# Allegro board CC13xxEM-7XD-7793.brd
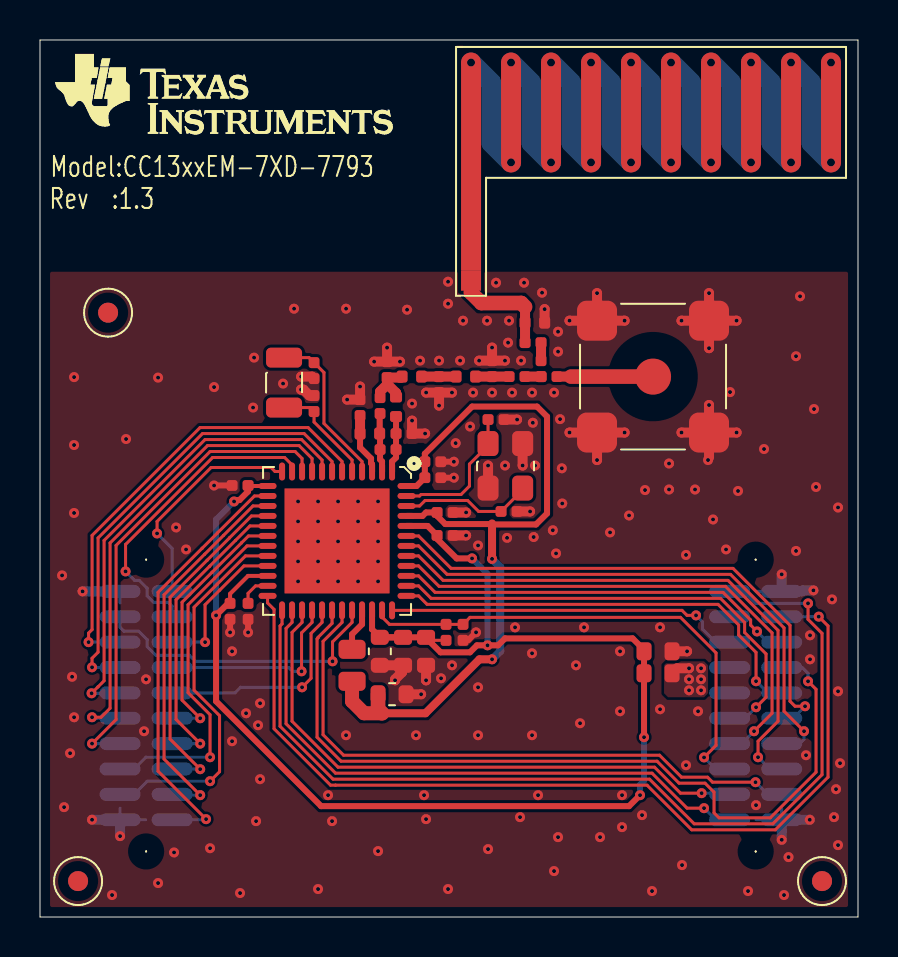
[diagram p0: board, top side]
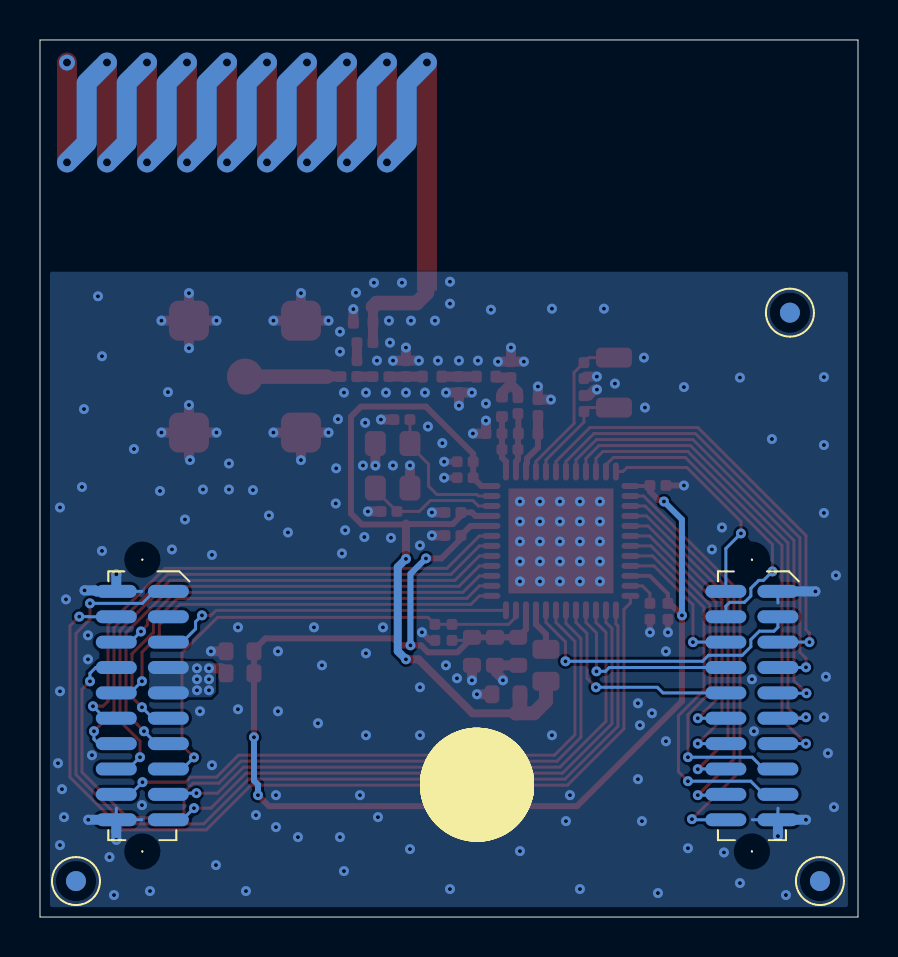
[diagram p1: board, bottom side, seen from below]

Outline 40.9 x 43.9 mm; copper layers: TOP, BOTTOM. Coordinates in mm from the lower left corner of the outline.
Outline path: 0,43.9 0,0 40.9,0 40.9,43.9 0,43.9

## Placement (name value [footprint] x y rotation side)
A1  Antenna PCB helix 868/915MHz  [ANTENNA868_915MHZ]  21.55 31.85 0 top
C1  DNM  [CAPC1608X90L]  30.2 13.3 0 top
C11  3.6pF  [CAPC1005X60L]  17.8 24.2 0 top
C12  2.7pF  [CAPC1005X60L]  17.35 27 90 top
C13  6.2pF  [CAPC1005X60L]  19.95 26.25 90 top
C14  3.3pF  [CAPC1005X60L]  22.6 27.85 270 top
C15  100pF  [CAPC1005X60L]  24.25 27.05 180 top
C16  1pF  [CAPC1005X60L]  24.25 28.75 0 top
C21  100pF  [CAPC1005X60L]  16 25.9 270 top
C22  3.6pF  [CAPC1005X60L]  17 25.2 90 top
C41  12pF  [CAPC1005X60L]  13.7 27.75 270 top
C51  12pF  [CAPC1005X60L]  13.7 25.3 90 top
C131  100nF  [CAPC1005X60L]  10.4 21.6 180 top
C221  100nF  [CAPC1005X60L]  9.5 15.7 270 top
C231  1uF  [CAPC1005X60L]  10.4 15.7 270 top
C331  22uF  [CAPC1608X100A2L]  16.9 11.15 0 top
C341  22uF  [CAPC1608X100A2L]  16.99 14 270 top
C342  100nF  [CAPC1608X90L]  18.15 14 270 top
C343  NC  [CAPC1608X90L]  19.3 14 270 top
C351  100nF  [CAPC1005X60L]  21.15 14.65 270 top
C441  100nF  [CAPC1005X60L]  19.85 19.1 0 top
C451  100nF  [CAPC1005X60L]  19.85 20.25 0 top
C461  DNM  [CAPC1005X60L]  23.05 20.3 0 top
C471  DNM  [CAPC1005X60L]  22.4 24.9 0 top
C481  100nF  [CAPC1005X60L]  19.24 21.99 0 top
C482  DNM  [CAPC1005X60L]  19.24 22.79 0 top
FIDU1  FIDU_1MM  [FID100X115]  1.9 1.8 0 top
FIDU2  FIDU_1MM  [FID100X115]  39.1 1.8 0 top
FIDU3  FIDU_1MM  [FID100X115]  3.4 30.25 0 top
FIDU4  FIDU_1MM  [FID100X115]  1.9 1.8 180 bottom
FIDU5  FIDU_1MM  [FID100X115]  39.1 1.8 180 bottom
FIDU6  FIDU_1MM  [FID100X115]  3.4 30.25 180 bottom
FL1  BLM18HE152SN1  [FIL_BLM18HE152SN1DL]  30.2 12.2 0 top
J1  SMA-10V21-TGG  [HUSTSAN_SMA10V21TGGAN]  30.65 27.05 0 top
L11  18nH  [IND_LQW15AL#2]  17.8 23.4 180 top
L12  7.5nH  [IND_LQW15AN]  17.8 25.05 90 top
L13  6.8nH  [IND_LQW15AL]  18.1 27.05 0 top
L14  6.8nH  [IND_LQW15AL]  20.8 27.05 0 top
L15  12nH  [IND_LQW15AL]  24.25 29.75 0 top
L21  7.5nH  [IND_LQW15AN]  16 24.2 0 top
L331  6.8uH  [INDC2012X150L]  15.6 13.4 270 top
NOREF  -  []  0 40.78 0 top
NOREF#2  -  []  32.36 0 90 top
NOREF#3  -  []  1.75 43.2 0 top
NOREF#4  -  []  22.22 3.59 180 bottom
P1  SFM-110-02-S-D-A-K-TR  [SAMTEC_SFM11002AN]  4 16.3 0 bottom
P2  SFM-110-02-S-D-A-K-TR  [SAMTEC_SFM11002AN]  34.48 16.3 0 bottom
R11  0  [RESC1005X40L]  25.85 27.05 180 top
R12  DNM  [RESC1005X40L]  25.05 27.05 90 top
R351  100k  [RESC1005X40L]  20.3 14.65 270 top
U1  CC13xx 7x7  [QFNFC50P700X700X80-49CN]  17.6 22.3 180 top
Y1  32.768kHz  [XTAL_FC-135N]  12.2 28 270 top
Y2  24MHz  [OSCCC250X320X60-4L]  22.4 23.7 270 top

## Library data of the parts
A1 = ANTENNA
C1 C342 C343 = CAPACITOR: alternate symbols: (CAPC1608X90L,CAPC1608X90M)
C11-C16 C21 C22 C41 C51 C131 C221 C231 C351 C441 C451 C461 C471 C481 C482 = CAPACITOR: alternate symbols: (CAPC1005X60L,CAPC1005X60M)
C331 C341 = CAPACITOR: User Part Number: #PN; alternate symbols: (CAPC1608X100A2L,CAPC1608X100A2M)
FIDU1-FIDU6 = FIDMARK
FL1 = FILTER_2PIN: alternate symbols: (FIL_BLM18HE152SN1DL,FIL_BLM18HE152SN1DM)
J1 = CONN_COAX_1+4: alternate symbols: (HUSTSAN_SMA10V21TGGL,HUSTSAN_SMA10V21TGGM)
L11 = INDUCTOR: alternate symbols: (IND_LQW15AL,IND_LQW15AM,INDC1005X60L,INDC1005X60M)
L12-L15 L21 = INDUCTOR: alternate symbols: (IND_LQW15AM,IND_LQW15AL)
L331 = INDUCTOR: alternate symbols: (INDC2012X150L,INDC2012X150M)
P1 P2 = CONN_HEADER_2X10_P_S
R11 R12 R351 = RESISTOR: alternate symbols: (RESC1005X40L,RESC1005X40M)
U1 = IC_RF_CC13XX_7X7_QFN48_V2: alternate symbols: (QFNFC50P700X700X80-49CL,QFNFC50P700X700X80-49CM)
Y1 = CRYSTAL: alternate symbols: (XTAL_FC-135L,XTAL_FC-135M)
Y2 = XTAL_4PIN_S: alternate symbols: (OSCCC250X320X60-4L,OSCCC250X320X60-4M)

## Footprints (pads in the part's own frame, mm; a bottom-side part is the same pattern mirrored in y, then rotated)
ANTENNA868_915MHZ
  rect 1x1 smd: 1(0,0)
CAPC1005X60L
  custom 0.55x0.54 smd: 1(0,0) 2(0.8,0)
CAPC1608X90L
  custom 0.75x0.9 smd: 1(0,0) 2(1.4,0)
CAPC1608X100A2L
  custom 0.75x0.9 smd: 1(0,0) 2(1.4,0)
FID100X115
  oval 1x1 smd: 1(0,0)
FIL_BLM18HE152SN1DL
  custom 0.75x0.9 smd: 1(0,0) 2(1.4,0)
HUSTSAN_SMA10V21TGGAN
  round 1.801 smd: 1(0,0)
  custom 2x2 smd: 2(-2.8,-2.8) 3(2.8,-2.8) 4(2.8,2.8) 5(-2.8,2.8)
IND_LQW15AL
  custom 0.55x0.6 smd: 1(0,0) 2(0.98,0)
IND_LQW15AL#2
  custom 0.55x0.54 smd: 1(0,0) 2(0.8,0)
IND_LQW15AN
  custom 0.55x0.6 smd: 1(0,0) 2(0.98,0)
INDC2012X150L
  custom 0.95x1.352 smd: 1(0,0) 2(1.6,0)
OSCCC250X320X60-4L
  custom 1.25x1.05 smd: 1(0,0) 2(2.23,0) 3(2.23,1.73) 4(0,1.73)
QFNFC50P700X700X80-49CN
  oval 0.3x0.9 smd: 1(0,0) 2(0.5,0) 3(1,0) 4(1.5,0) 5(2,0) 6(2.5,0) 7(3,0) 8(3.5,0) 9(4,0) 10(4.5,0) 11(5,0) 12(5.5,0) 25(5.5,6.95) 26(5,6.95) 27(4.5,6.95) 28(4,6.95) 29(3.5,6.95) 30(3,6.95) 31(2.5,6.95) 32(2,6.95) 33(1.5,6.95) 34(1,6.95) 35(0.5,6.95) 36(0,6.95)
  oval 0.9x0.3 smd: 13(6.225,0.725) 14(6.225,1.225) 15(6.225,1.725) 16(6.225,2.225) 17(6.225,2.725) 18(6.225,3.225) 19(6.225,3.725) 20(6.225,4.225) 21(6.225,4.725) 22(6.225,5.225) 23(6.225,5.725) 24(6.225,6.225) 37(-0.725,6.225) 38(-0.725,5.725) 39(-0.725,5.225) 40(-0.725,4.725) 41(-0.725,4.225) 42(-0.725,3.725) 43(-0.725,3.225) 44(-0.725,2.725) 45(-0.725,2.225) 46(-0.725,1.725) 47(-0.725,1.225) 48(-0.725,0.725)
  rect 5.25x5.25 smd: 49(2.75,3.475)
RESC1005X40L
  custom 0.55x0.54 smd: 1(0,0) 2(0.8,0)
SAMTEC_SFM11002AN
  round 0.099 hole 1.501 unplated: (1.302,-1.588) (1.302,13.017)
  oval 2.05x0.65 smd: 1(0,0) 2(2.604,0) 3(0,1.27) 4(2.604,1.27) 5(0,2.54) 6(2.604,2.54) 7(0,3.81) 8(2.604,3.81) 9(0,5.08) 10(2.604,5.08) 11(0,6.35) 12(2.604,6.35) 13(0,7.62) 14(2.604,7.62) 15(0,8.89) 16(2.604,8.89) 17(0,10.16) 18(2.604,10.16) 19(0,11.43) 20(2.604,11.43)
XTAL_FC-135N
  custom 1x1.8 smd: 1(0,0) 2(2.5,0)

## Nets
GND: C1.2 C11.2 C12.2 C13.1 C14.1 C21.1 C41.2 C51.2 C131.2 C221.2 C231.2 C331.2 C341.2 C342.2 C343.2 C351.2 C441.2 C451.2 C461.2 C471.2 C481.2 C482.2 J1.2 J1.3 J1.4 J1.5 L15.2 P1.1 P1.19 P2.2 P2.20 U1.49(VSS) Y2.2 Y2.4
VDD_EB: FL1.2 P2.7 P2.9
VDDR: C331.1 C451.1 C481.1 C482.1 L331.2 U1.45(VDDR#45) U1.48(VDDR#48)
VDDS: C1.1 C131.1 C221.1 C341.1 C342.1 C343.1 C441.1 FL1.1 R351.2 U1.13(VDDS2) U1.22(VDDS3) U1.34(VDDS_DCDC) U1.44(VDDS)
DCDC_SW: L331.1 U1.33(DCDC_SW)
DIO_1: P1.5 U1.6(DIO_1)
DIO_2: P1.7 U1.7(DIO_2)
DIO_3: P1.9 U1.8(DIO_3)
DIO_4: P1.11 U1.9(DIO_4)
DIO_5: P1.13 U1.10(DIO_5)
DIO_6: P1.4 U1.11(DIO_6)
DIO_7: P1.2 U1.12(DIO_7)
DIO_8: P1.20 U1.14(DIO_8)
DIO_9: P1.18 U1.15(DIO_9)
DIO_10: P1.16 U1.16(DIO_10)
DIO_11: P1.14 U1.17(DIO_11)
DIO_12: P1.12 U1.18(DIO_12)
DIO_13: P1.15 U1.19(DIO_13)
DIO_14: P1.17 U1.20(DIO_14)
DIO_15: P1.6 U1.21(DIO_15)
DIO_16 / JTAG TDO: P2.19 U1.26(DIO_16)
DIO_17 / JTAG TDI: P2.17 U1.27(DIO_17)
DIO_18: P1.8 U1.28(DIO_18)
DIO_19: P1.10 U1.29(DIO_19)
DIO_20: P2.8 U1.30(DIO_20)
DIO_21: P2.18 U1.31(DIO_21)
DIO_22: P1.3 U1.32(DIO_22)
DIO_23: P2.5 U1.36(DIO_23)
DIO_24: P2.10 U1.37(DIO_24)
DIO_25: P2.11 U1.38(DIO_25)
DIO_26: P2.6 U1.39(DIO_26)
DIO_27: P2.13 U1.40(DIO_27)
DIO_28: P2.16 U1.41(DIO_28)
DIO_29: P2.14 U1.42(DIO_29)
DIO_30: P2.12 U1.43(DIO_30)
JTAG_TCK: P2.1 U1.25(JTAG_TCKC)
JTAG_TMS: P2.4 U1.24(JTAG_TMSC)
NRESET: C351.1 P2.15 R351.1 U1.35(RESET_N)
N352644: J1.1 R11.1
N353082: A1.1(FEED/GND_1) C16.1 L15.1
N429469: C461.1 U1.46(X24M_N) Y2.3
N430333: C22.1 L11.2 L21.2 U1.2(RF_N)
N430341: C11.1 L11.1 L12.1 U1.1(RF_P)
N430415: C12.1 C22.2 L12.2 L13.1
N430451: C13.2 L13.2 L14.1
N430545: C231.1 U1.23(DCOUPL)
N430561: C41.1 U1.4(X32K_Q1) Y1.1
N430573: C51.1 U1.5(X32K_Q2) Y1.2
N431011: C14.2 C15.2 L14.2
N436267: C15.1 R11.2 R12.1
N437185: C16.2 R12.2
N440626: C21.2 L21.1 U1.3(RX_TX)
N460170: C471.1 U1.47(X24M_P) Y2.1

Pads without a net: FIDU1 1; FIDU2 1; FIDU3 1; FIDU4 1; FIDU5 1; FIDU6 1; P2 3

## Via types
v1: diameter 0.8, hole 0.4, TOP to BOTTOM, 19 vias
v2: diameter 0.5, hole 0.2, TOP to BOTTOM, 259 vias

## Routing (per net, layer and track width the routed paths; a pad name or vN(x,y) marks a point on that pad's centre or on a via; arc(x,y) is an arc through that point)
GND: length 58
  TOP w0.15: v2(14.9,18.8) 14.88,18.83 U1.49
  TOP w0.3: v2(10.4,14.25) C231.2 ; v2(20.7,21.99) C481.2 ; v2(21.8,14.25) 21.43,13.88 21.38,13.88 21.35,13.85 C351.2 ; v2(20.7,22.79) C482.2 ; C131.2 v2(8.7,21.6) ; C221.2 v2(9.5,14.25)
  TOP w0.5: v2(27.85,22.87) J1.2 ; J1.2 v2(26.48,24.25) ; J1.2 v2(29.23,24.25) ; v2(13.06,27.05) 13.6,27.05 C41.2 ; J1.4 v2(33.45,31.23) ; J1.4 v2(32.08,29.85) ; J1.4 v2(34.83,29.85) ; J1.4 v2(33.45,28.47) ; C471.2 v2(23.86,24.9) ; v2(15.36,25.9) C21.1 v2(16,26.55) ; Y2.2 v2(22.4,22.6) ; J1.3 v2(32.08,24.25) ; J1.3 33.45,23 ; J1.3 v2(34.83,24.25) ; J1.3 v2(33.45,25.63) ; C12.2 v2(16.71,27.8) ; C12.2 v2(18,27.8) ; C12.2 v2(17.35,28.5) ; C441.2 v2(21.31,19.1) ; v2(17.75,11.85) 17.75,11.9 18.1,12.25 18.1,12.4 18.15,12.45 C342.2 17.1,12.6 ; J1.5 v2(27.85,31.23) ; J1.5 v2(29.23,29.85) ; J1.5 v2(26.48,29.85) ; C451.2 v2(21.31,20.25) ; C13.1 v2(19.95,25.6) ; C13.1 v2(19.31,26.25) ; C13.1 v2(20.6,26.25) ; v2(19.3,11.85) C343.2 ; C14.1 v2(23.25,27.85) ; C14.1 v2(21.96,27.85) ; C14.1 v2(22.6,28.5) ; C331.2 v2(19.06,11.15) ; C51.2 13.48,26.1 13.18,26.4 v2(13.05,26.4) ; Y2.4 v2(24.13,22.6) ; v2(18.6,24.85) C11.2 v2(19.26,24.2) ; L15.2 v2(25.23,30.43) ; C1.2 v2(32.36,13.3) ; C461.2 v2(24.51,20.3)
  BOTTOM w0.15: 4,15.72 P1.1 ; 37.09,5.45 P2.20 35.81,4.87 ; 5.28,4.87 P1.19 4,5.45 ; 38.08,16.3 38.36,16.3 ; 35.81,16.3 P2.2
  BOTTOM w0.5: v2(38.49,4.87) P2.20 v2(37.09,3.87) ; v2(4,4.05) P1.19 v2(2.6,4.87) ; v2(37.09,17.15) P2.2 38.08,16.3 38.13,16.35 v2(38.67,16.35) ; P1.1 v2(2.13,16.3)
  vias: v2(1.1,17.1) v2(1.2,5.5) v2(1.5,8.2) v2(1.6,12.02) v2(1.7,27.02) v2(1.7,23.62) v2(1.7,20.22) v2(1.7,10) v2(3.6,1.1) v2(4.3,23.92) v2(5.2,9.3) v2(5.3,11.9) v2(5.9,27) v2(5.9,1.7) v2(6.7,3.23) v2(6.8,19.5) v2(7.3,18.4) v2(8.5,3.44) v2(8.7,26.52) v2(9.6,13.3) v2(9.6,8.8) v2(10,1.2) v2(10.3,10.2) v2(10.7,28) v2(10.65,25.5) v2(10.8,4.8) v2(10.9,9.6) v2(11,10.7) v2(11,6.9) v2(12.15,26.7) v2(12.7,30.45) v2(12.9,20.8) v2(12.9,19.8) v2(12.9,18.8) v2(12.9,17.8) v2(12.9,16.8) v2(13.9,20.8) v2(13.9,19.8) v2(13.9,18.8) v2(13.9,17.8) v2(13.9,16.8) v2(13.9,1.4) v2(14.4,6.1) v2(14.6,4.8) v2(14.9,20.8) v2(14.9,19.8) v2(14.9,17.8) v2(14.9,16.8) v2(15.3,30.45) v2(15.3,9.1) v2(15.9,20.8) v2(15.9,19.8) v2(15.9,18.8) v2(15.9,17.8) v2(15.9,16.8) v2(16.9,20.8) v2(16.9,19.8) v2(16.9,18.8) v2(16.9,17.8) v2(16.9,16.8) v2(16.9,3.3) v2(18.35,30.4) v2(18.6,25.7) v2(18.8,9.1) v2(19,27.85) v2(19.2,6.1) v2(19.3,4.9) v2(19.95,27.85) v2(20.05,11.95) v2(20.4,31.8) v2(20.4,30.7) v2(20.4,1.4) v2(20.6,12.6) v2(20.78,23.72) v2(21,27.85) v2(21.15,29.85) v2(21.5,24.55) v2(21.65,26.25) v2(21.9,18.6) v2(21.9,11.5) v2(21.9,9.1) v2(22.35,29.85) v2(22.4,3.4) v2(22.6,26.25) v2(22.8,31.75) v2(23.25,22.6) v2(23.35,18.98) v2(23.45,29.85) v2(23.4,28.75) v2(23.6,26.25) v2(23.75,14.5) v2(24,5) v2(24.05,27.85) v2(24.2,31.75) v2(24.6,26.25) v2(24.64,24.74) v2(24.6,13.2) v2(24.6,9.1) v2(24.68,19.02) v2(24.75,22.6) v2(24.9,6.1) v2(25.1,31.25) v2(25.64,19.36) v2(25.7,26.25) v2(25.7,2.3) v2(25.8,18.2) v2(25.9,29.3) v2(25.9,28.3) v2(25.9,4) v2(26,24.92) v2(26.09,22.46) v2(26.11,20.7) v2(26.8,12.6) v2(27,9.7) v2(27.2,14.5) v2(28,4) v2(28.5,19.25) v2(29,13.3) v2(29,10.3) v2(29.1,6.1) v2(29.1,4.5) v2(29.45,20.1) v2(30.1,5.1) v2(30.25,21.37) v2(30.6,1.3) v2(31,14.5) v2(31,10.4) v2(31.45,22.7) v2(31.45,21.4) v2(32.1,2.6) v2(32.3,18.12) v2(32.3,7.6) v2(32.75,21.4) v2(32.9,10.3) v2(33.4,22.87) v2(33.65,19.9) v2(34.3,18.4) v2(34.5,26.27) v2(34.9,21.33) v2(35.4,1.3) v2(35.8,5.6) v2(36.2,23.42) v2(37.2,1.1) v2(37.43,3) v2(37.8,28.07) v2(37.8,18.33) v2(38,31.07) v2(38.3,8.1) v2(38.5,14.1) v2(38.5,12.9) v2(38.7,25.42) v2(38.8,21.52) v2(39.6,15.9) v2(39.7,5) v2(39.8,6.4) v2(39.9,20.5) v2(39.9,11.3) v2(39.9,3.6) v2(40,7.7)
VDD_EB: length 1
  TOP w0.5: v2(32.45,12.45) 31.85,12.45 FL1.2
  vias: v2(32.45,11.9) v2(32.45,11.35) v2(33.05,12.45) v2(33.05,11.9) v2(33.05,11.35)
VDDR: length 39.7
  TOP w0.3: U1.48 18.83,21.58 C481.1 C482.1 19.24,23.19 21.61,25.55 24.85,25.55 25.35,25.05 25.35,20.2 24.8,19.65 22.65,19.65 22.6,19.7 22.57,19.67 20.26,19.67 19.85,20.08 C451.1 19.3,20.25 19.13,20.08 U1.45
  TOP w0.4: 17.1,10.2 19.28,10.2 21.98,12.9 v2(22.6,12.9) ; 22.6,19.7 v2(22.6,17.93)
  TOP w0.7: L331.2 15.6,10.8 16.2,10.2 17.1,10.2
  TOP w0.73: 17.1,10.2 16.9,10.4 C331.1
  BOTTOM w0.4: v2(22.6,17.93) 23.01,17.52 23.01,13.31 v2(22.6,12.9)
VDDS: length 73.7
  TOP w0.15: C343.1 19.45,13.85 R351.2
  TOP w0.2: U1.13 10.43,21.58 C131.1 ; U1.22 10.4,17.08 9.5,16.18 C221.1
  TOP w0.3: C342.1 18.15,14 C341.1 ; C342.1 17,14 16.6,14.4 U1.34 ; C342.1 C343.1 19.3,13.97 20.03,13.25 21.5,13.25 21.85,13.6 v2(22.38,13.6) 22.91,13.6 23.25,13.95 29.63,13.95 30.2,13.38 C1.1 FL1.1 v2(30.2,9) ; C131.1 10.4,21.3 9.98,20.87 9.78,20.87 v2(9.7,20.8) ; v2(21.6,17.95) 20.83,17.95 19.85,18.93 C441.1 19.38,19.58 U1.44 ; C221.1 9.41,15.7 v2(8.8,15.1) 8.8,10.8 14.05,5.55 29.45,5.55 v2(30,6.1)
  BOTTOM w0.3: v2(8.8,15.1) 8.8,19.9 v2(9.7,20.8) ; v2(30,6.1) 30,6.63 30.2,6.83 v2(30.2,9) ; v2(21.6,17.95) 22.38,17.18 v2(22.38,13.6)
DCDC_SW: length 2.2
  TOP w0.3: U1.33 16.1,14.65 15.6,14.15 L331.1
DIO_1: length 22.9
  TOP w0.15: U1.6 15.1,22.8 13.41,24.5 8,24.5 2.6,19.1 2.6,14.39 2.43,14.21 v2(2.43,13.76)
  BOTTOM w0.15: v2(2.43,13.76) P1.5
DIO_2: length 23
  TOP w0.15: v2(2.6,12.5) 2.6,12.95 2.9,13.25 2.9,18.97 8.13,24.2 13.2,24.2 14.6,22.8 U1.7
  BOTTOM w0.15: P1.7 2.81,12.49 2.8,12.5 v2(2.6,12.5)
DIO_3: length 23.3
  TOP w0.15: U1.8 14.1,22.88 13.08,23.9 8.25,23.9 3.2,18.85 3.2,11.82 2.9,11.52 v2(2.58,11.2)
  BOTTOM w0.15: P1.9 3.98,11.2 v2(2.58,11.2)
DIO_4: length 23.8
  TOP w0.15: U1.9 13.6,22.95 12.95,23.6 8.38,23.6 3.5,18.72 3.5,10.45 3.05,10 v2(2.6,10)
  BOTTOM w0.15: v2(2.6,10) 2.8,10 2.85,9.95 P1.11
DIO_5: length 23.9
  TOP w0.15: U1.10 13.1,22.95 12.76,23.3 8.5,23.3 3.8,18.6 3.8,9.88 v2(2.6,8.68)
  BOTTOM w0.15: P1.13 v2(2.6,8.68)
DIO_6: length 15.8
  TOP w0.15: U1.11 12.6,22.63 12.23,23 8.63,23 4.28,18.65 v2(4.28,17.3)
  BOTTOM w0.15: P1.4 6.61,15.56 6.42,15.75 5.68,15.75 5.36,16.07 5.36,16.46 4.96,16.85 4.73,16.85 v2(4.28,17.3)
DIO_7: length 11.3
  TOP w0.15: v2(5.85,19.2) 5.85,19.8 8.55,22.5 11.55,22.5 11.75,22.3 U1.12
  BOTTOM w0.15: P1.2 6.61,18.45 v2(5.85,19.2)
DIO_8: length 21.5
  TOP w0.15: v2(8.3,4.9) 5.9,7.3 5.9,16.26 8.11,18.46 10.72,21.08 U1.14
  BOTTOM w0.15: P1.20 8.27,4.87 v2(8.3,4.9)
DIO_9: length 19.2
  TOP w0.15: U1.15 10.65,20.58 9.18,19.1 9.18,19.1 8.23,18.16 6.2,16.13 6.2,7.91 v2(8.01,6.1)
  BOTTOM w0.15: v2(8.01,6.1) 6.65,6.1 P1.18
DIO_10: length 17.2
  TOP w0.15: U1.16 10.57,20.08 9.48,18.98 9.48,18.98 8.36,17.86 8.36,17.86 6.5,16.01 6.5,8.91 v2(8.01,7.4)
  BOTTOM w0.15: P1.16 7.84,7.41 7.84,7.4 v2(8.01,7.4)
DIO_11: length 15.2
  TOP w0.15: v2(8.01,8.68) 6.8,9.89 6.8,15.88 8.48,17.56 8.48,17.56 9.78,18.85 10.5,19.58 U1.17
  BOTTOM w0.15: v2(8.01,8.68) P1.14
DIO_12: length 13.2
  TOP w0.15: v2(8.01,9.95) 7.1,10.86 7.1,15.76 8.61,17.26 10.42,19.08 U1.18
  BOTTOM w0.15: v2(8.01,9.95) P1.12
DIO_13: length 18
  TOP w0.15: U1.19 10.35,18.58 8.73,16.96 7.4,15.63 7.4,11.23 8.5,10.13 v2(8.5,8)
  BOTTOM w0.15: P1.15 4.7,7.41 5.29,8 v2(8.5,8)
DIO_14: length 18.9
  TOP w0.15: U1.20 10.27,18.08 8.86,16.66 8.86,16.66 7.7,15.51 7.7,11.35 8.98,10.08 8.98,7.27 v2(8.5,6.8)
  BOTTOM w0.15: v2(8.5,6.8) 5.36,6.8 4.7,6.14 P1.17
DIO_15: length 7.4
  TOP w0.15: U1.21 10.2,17.58 8.98,16.36 8.98,16.36 8.25,15.63 v2(8.25,13.76)
  BOTTOM w0.15: P1.6 v2(8.25,13.76)
DIO_16 / JTAG TDO: length 30
  TOP w0.15: U1.26 12.6,14.75 12.3,14.45 12.3,9.67 14.78,7.2 30.6,7.2 32.35,5.45 v2(33.2,5.45)
  BOTTOM w0.15: v2(33.2,5.45) 33.78,4.87 P2.19
DIO_17 / JTAG TDI: length 29.2
  TOP w0.15: v2(33.08,6.2) 32.03,6.2 30.73,7.5 14.9,7.5 12.6,9.8 12.6,14.25 13.1,14.75 U1.27
  BOTTOM w0.15: v2(33.08,6.2) 33.72,6.2 33.78,6.14 P2.17
DIO_18: length 9.8
  TOP w0.15: v2(13.08,12.3) 13.08,14.22 13.6,14.75 U1.28
  BOTTOM w0.15: P1.8 12.44,12.49 12.63,12.3 v2(13.08,12.3)
DIO_19: length 10.9
  TOP w0.15: U1.29 14.1,14.75 13.55,14.2 13.55,11.95 v2(13.1,11.5)
  BOTTOM w0.15: P1.10 9.75,11.22 10.03,11.5 v2(13.1,11.5)
DIO_20: length 41.4
  TOP w0.15: U1.30 14.6,14.7 13.9,14 13.9,13.97 13.85,13.92 13.85,9 15.05,7.8 30.85,7.8 31.95,6.7 33.25,6.7 33.7,6.25 33.7,5.22 33.95,4.97 36.52,4.97 38.8,7.25 38.8,11.4 v2(38.4,11.8)
  BOTTOM w0.15: P2.8 38.11,12.49 38.4,12.2 v2(38.4,11.8)
DIO_21: length 30.8
  TOP w0.15: U1.31 15.1,14.75 14.15,13.8 14.15,9.12 15.18,8.1 30.98,8.1 32.08,7 33.38,7 33.63,6.75 v2(35.78,6.75)
  BOTTOM w0.15: v2(35.78,6.75) 36.39,6.14 P2.18
DIO_22: length 15
  TOP w0.15: v2(14.63,12.8) 14.63,13.77 15.6,14.75 U1.32
  BOTTOM w0.15: P1.3 4,14.5 4.2,14.31 4.93,14.31 5.36,13.88 5.36,13.53 5.79,13.1 7.48,13.1 7.78,12.8 v2(14.63,12.8)
DIO_23: length 17.7
  TOP w0.15: v2(32.8,15.1) 32.35,15.1 32.1,15.35 U1.36
  BOTTOM w0.15: v2(32.8,15.1) 33.12,14.78 33.12,14.42 33.78,13.76 P2.5
DIO_24: length 21.9
  TOP w0.15: v2(35.8,11.8) 35.8,13.25 34.93,14.12 34.93,14.62 33.9,15.65 19.36,15.65 18.93,16.08 U1.37
  BOTTOM w0.15: P2.10 36.39,11.22 v2(35.8,11.8)
DIO_25: length 24.1
  TOP w0.15: v2(35.8,10.5) 36.3,11 36.3,13.17 35.23,14.24 35.23,14.74 34.03,15.95 19.56,15.95 18.93,16.58 U1.38
  BOTTOM w0.15: P2.11 35.25,9.95 v2(35.8,10.5)
DIO_26: length 20.3
  TOP w0.15: v2(35.85,14.29) 35.53,14.61 35.53,14.87 34.15,16.25 19.76,16.25 18.93,17.08 U1.39
  BOTTOM w0.15: P2.6 36.39,13.76 v2(35.85,14.29)
DIO_27: length 26.4
  TOP w0.15: v2(35.7,9.3) 36.6,10.2 36.6,14.22 34.28,16.55 19.96,16.55 18.93,17.58 U1.40
  BOTTOM w0.15: P2.13 35.08,8.68 v2(35.7,9.3)
DIO_28: length 28.3
  TOP w0.15: U1.41 18.93,18.08 20.16,16.85 34.4,16.85 36.9,14.35 36.9,9.8 35.9,8.8 v2(35.9,8)
  BOTTOM w0.15: P2.16 37.08,7.4 36.5,7.4 v2(35.9,8)
DIO_29: length 27.8
  TOP w0.15: U1.42 18.93,18.58 20.36,17.15 34.53,17.15 37.2,14.47 37.2,10.3 v2(38.2,9.3)
  BOTTOM w0.15: v2(38.2,9.3) 38.2,8.9 37.98,8.68 P2.14
DIO_30: length 27.1
  TOP w0.15: U1.43 18.93,19.08 20.56,17.45 34.65,17.45 37.5,14.6 37.5,10.8 37.75,10.55 v2(38.25,10.55)
  BOTTOM w0.15: v2(38.25,10.55) 37.65,9.95 P2.12
JTAG_TCK: length 49
  TOP w0.15: U1.25 12.1,14.67 12,14.57 12,9.55 14.65,6.9 30.48,6.9 32.71,4.67 36.64,4.67 39.1,7.12 39.1,14.2 38.4,14.9 v2(38.4,15.7)
  BOTTOM w0.15: P2.1 35.18,16.3 35.78,15.7 v2(38.4,15.7)
JTAG_TMS: length 47.8
  TOP w0.15: v2(38.94,15.04) 39.4,14.57 39.4,7 36.77,4.37 32.59,4.37 30.35,6.6 14.78,6.6 14.78,6.6 14.53,6.6 11.7,9.42 11.7,15.4 11.38,15.72 U1.24
  BOTTOM w0.15: P2.4 38.48,15.03 38.49,15.04 v2(38.94,15.04)
Net_1:
  vias: v1(23.55,42.77) v1(25.55,37.77)
Net_2:
  vias: v1(25.55,42.77) v1(27.55,37.77)
Net_3:
  vias: v1(27.55,42.77) v1(29.55,37.77)
Net_4:
  vias: v1(29.55,42.77) v1(31.55,37.77)
Net_5:
  vias: v1(31.55,42.77) v1(33.55,37.77)
Net_6:
  vias: v1(33.55,42.77) v1(35.55,37.77)
Net_7:
  vias: v1(35.55,42.77) v1(37.55,37.77)
Net_8:
  vias: v1(37.55,42.77) v1(39.55,42.77) v1(39.55,37.77)
Net_9:
  vias: v1(21.55,42.77) v1(23.55,37.77)
NRESET: length 25.1
  TOP w0.15: U1.35 17.1,15.02 17.47,14.65 R351.1 C351.1 21.5,15 32.03,15 33.8,13.22 33.8,8.59 v2(33.2,7.99)
  BOTTOM w0.15: P2.15 33.78,7.41 v2(33.2,7.99)
N352644: length 4.8
  TOP w0.5: 26.55,27.05 R11.1
  TOP w0.73: J1.1 26.55,27.05
N353082: length 5.4
  TOP w0.5: 24.25,30.54 L15.1 C16.1
  TOP w0.73: 24.25,30.54 24.06,30.73 22.07,30.73 21.55,31.25 A1.1
N429469: length 6.7
  TOP w0.15: U1.46 18.98,20.58 19.26,20.85 21.38,20.85 21.93,20.3 C461.1 24.13,21.38 Y2.3
N430333: length 3
  TOP w0.3: C22.1 16.98,25.18 L21.2 17,24.18 L11.2 17,22.9 17.1,22.8 U1.2
N430341: length 2.8
  TOP w0.3: L12.1 C11.1 L11.1 17.8,23 17.6,22.8 U1.1
N430415: length 2.8
  TOP w0.5: 17.35,26.69 17.35,26.65 17,26.3 C22.2 ; 17.35,26.69 C12.1 18.05,27 L13.1 ; 17.35,26.69 17.8,26.24 L12.2
N430451: length 1.7
  TOP w0.5: L13.2 C13.2 L14.1
N430545: length 1.6
  TOP w0.15: U1.23 10.78,16.58 10.4,16.2 C231.1
N430561: length 8
  TOP w0.15: U1.4 16.1,22.8 14.2,24.7 14.2,27.25 C41.1 13.45,28 Y1.1
N430573: length 5.4
  TOP w0.15: U1.5 15.6,22.88 13.7,24.77 C51.1 13.5,25.5 Y1.2
N431011: length 1.7
  TOP w0.5: C15.2 C14.2 L14.2
N436267: length 0.8
  TOP w0.5: C15.1 R12.1
N437185: length 0.9
  TOP w0.5: R12.2 C16.2
N440626: length 3
  TOP w0.3: L21.1 16,23.5 16.55,22.95 16.55,22.71 16.6,22.66 U1.3
  TOP w0.5: L21.1 C21.2
N460170: length 7.1
  TOP w0.15: U1.47 18.98,21.08 19.06,21.15 21.05,21.15 21.47,21.57 21.47,22.67 22.4,23.6 Y2.1 C471.1

## Copper pours and planes (outline as drawn; the poured copper is in the pictures)
GND on TOP: 0.5,0.5 0.5,32.3 40.4,32.3 40.4,0.5 ; 7 cut-outs
GND on BOTTOM: 0.5,0.5 0.5,32.3 40.4,32.3 40.4,0.5 ; 8 cut-outs
VDD_EB on TOP: 31.4,12.8 33.2,12.8 33.4,12.6 33.4,11.2 33.2,11 31.4,11 31.2,11.2 31.2,12.6
VDD_EB on BOTTOM: 32.3,12.8 35.2,12.8 35.45,12.55 35.45,11.15 35.3,11 32.35,11 32.1,11.25 32.1,12.6
Net_1 on BOTTOM (solid shape): 23.2,42.42 23.2,43.12 23.91,43.12 24.92,42.11 25.03,41.95 25.07,41.76 25.07,38.96 25.91,38.12 25.91,37.42 25.2,37.42 24.21,38.4 24.1,38.56 24.07,38.76 24.07,41.55
Net_2 on BOTTOM (solid shape): 25.2,42.42 25.2,43.12 25.91,43.12 26.92,42.11 27.03,41.95 27.07,41.76 27.07,38.96 27.9,38.12 27.9,37.42 27.2,37.42 26.21,38.4 26.1,38.56 26.07,38.76 26.07,41.55
Net_3 on BOTTOM (solid shape): 27.2,42.42 27.2,43.12 27.91,43.12 28.92,42.11 29.03,41.95 29.07,41.76 29.07,38.96 29.91,38.12 29.91,37.42 29.2,37.42 28.21,38.4 28.1,38.57 28.07,38.76 28.07,41.55
Net_4 on BOTTOM (solid shape): 29.2,42.42 29.2,43.12 29.91,43.12 30.92,42.11 31.03,41.95 31.07,41.76 31.07,38.96 31.91,38.12 31.9,37.42 31.2,37.42 30.21,38.4 30.1,38.57 30.07,38.76 30.07,41.55
Net_5 on BOTTOM (solid shape): 31.2,42.42 31.2,43.12 31.91,43.12 32.92,42.11 33.03,41.95 33.07,41.76 33.07,38.96 33.9,38.12 33.9,37.42 33.2,37.42 32.21,38.4 32.1,38.57 32.07,38.76 32.07,41.55
Net_6 on BOTTOM (solid shape): 33.2,42.42 33.2,43.12 33.91,43.12 34.92,42.11 35.03,41.95 35.07,41.76 35.07,38.96 35.91,38.12 35.91,37.42 35.2,37.42 34.21,38.4 34.1,38.56 34.07,38.76 34.07,41.55
Net_7 on BOTTOM (solid shape): 35.2,42.42 35.2,43.12 35.91,43.12 36.92,42.11 37.03,41.95 37.07,41.76 37.07,38.96 37.9,38.12 37.9,37.42 37.2,37.42 36.21,38.4 36.1,38.56 36.07,38.76 36.07,41.55
Net_8 on BOTTOM (solid shape): 37.2,42.42 37.2,43.12 37.91,43.12 38.92,42.11 39.03,41.95 39.07,41.76 39.07,38.96 39.91,38.12 39.91,37.42 39.2,37.42 38.21,38.4 38.1,38.57 38.07,38.76 38.07,41.55
Net_9 on BOTTOM (solid shape): 21.2,42.42 21.2,43.12 21.91,43.12 22.92,42.11 23.03,41.95 23.07,41.76 23.07,38.96 23.91,38.12 23.91,37.42 23.2,37.42 22.21,38.4 22.11,38.57 22.07,38.76 22.07,41.55
Net_1 on TOP (solid shape): 25.05,42.77 25.55,43.27 26.05,42.77 26.05,37.77 25.55,37.27 25.05,37.77
Net_2 on TOP (solid shape): 27.05,42.77 27.55,43.27 28.05,42.77 28.05,37.77 27.55,37.27 27.05,37.77
Net_3 on TOP (solid shape): 29.05,42.77 29.55,43.27 30.05,42.77 30.05,37.77 29.55,37.27 29.05,37.77
Net_4 on TOP (solid shape): 31.05,42.77 31.55,43.27 32.05,42.77 32.05,37.77 31.55,37.27 31.05,37.77
Net_5 on TOP (solid shape): 33.05,42.77 33.55,43.27 34.05,42.77 34.05,37.77 33.55,37.27 33.05,37.77
Net_6 on TOP (solid shape): 35.05,42.77 35.55,43.27 36.05,42.77 36.05,37.77 35.55,37.27 35.05,37.77
Net_7 on TOP (solid shape): 37.05,42.77 37.55,43.27 38.05,42.77 38.05,37.77 37.55,37.27 37.05,37.77
Net_8 on TOP (solid shape): 39.05,42.77 39.55,43.27 40.05,42.77 40.05,37.77 39.55,37.27 39.05,37.77
Net_9 on TOP (solid shape): 21.05,42.77 21.55,43.27 22.05,42.77 22.05,32.35 21.05,32.35
Net_9 on TOP (solid shape): 23.05,42.77 23.55,43.27 24.05,42.77 24.05,37.77 23.55,37.27 23.05,37.77

## Text on the board
Ref Des/Silkscreen Top: Rev  :1.3 | Model:CC13xxEM-7XD-7793
XSECTION_CHART: L1: TOP CONDUCTOR - COPPER 0.035 MM | *  DIELECTRIC - FR-4 0.73 MM | L2: BOTTOM CONDUCTOR - COPPER 0.035 MM | DESIGN CROSS SECTION CHART | ___________________________ | TOTAL THICKNESS 0.8 MM
User.5: FIGURE | SIZE | 0.2 | 0.4 | 1.501 | DRILL CHART: TOP to BOTTOM | ALL UNITS ARE IN MILLIMETERS | PLATED | NON-PLATED | QTY | 231 | 25 | 19 | 4
